# Altium PCB MainPCB.PcbDoc
Units mil, origin at the board's own origin, x right, y up, seen from the top; angles counter-clockwise.
Board outline 2055 x 2105 mil, 2 copper layers (Top Layer, Bottom Layer); 18 components, 10 nets, 70 pads, 3 vias.
Unrouted connection lines stored in the file: 1.
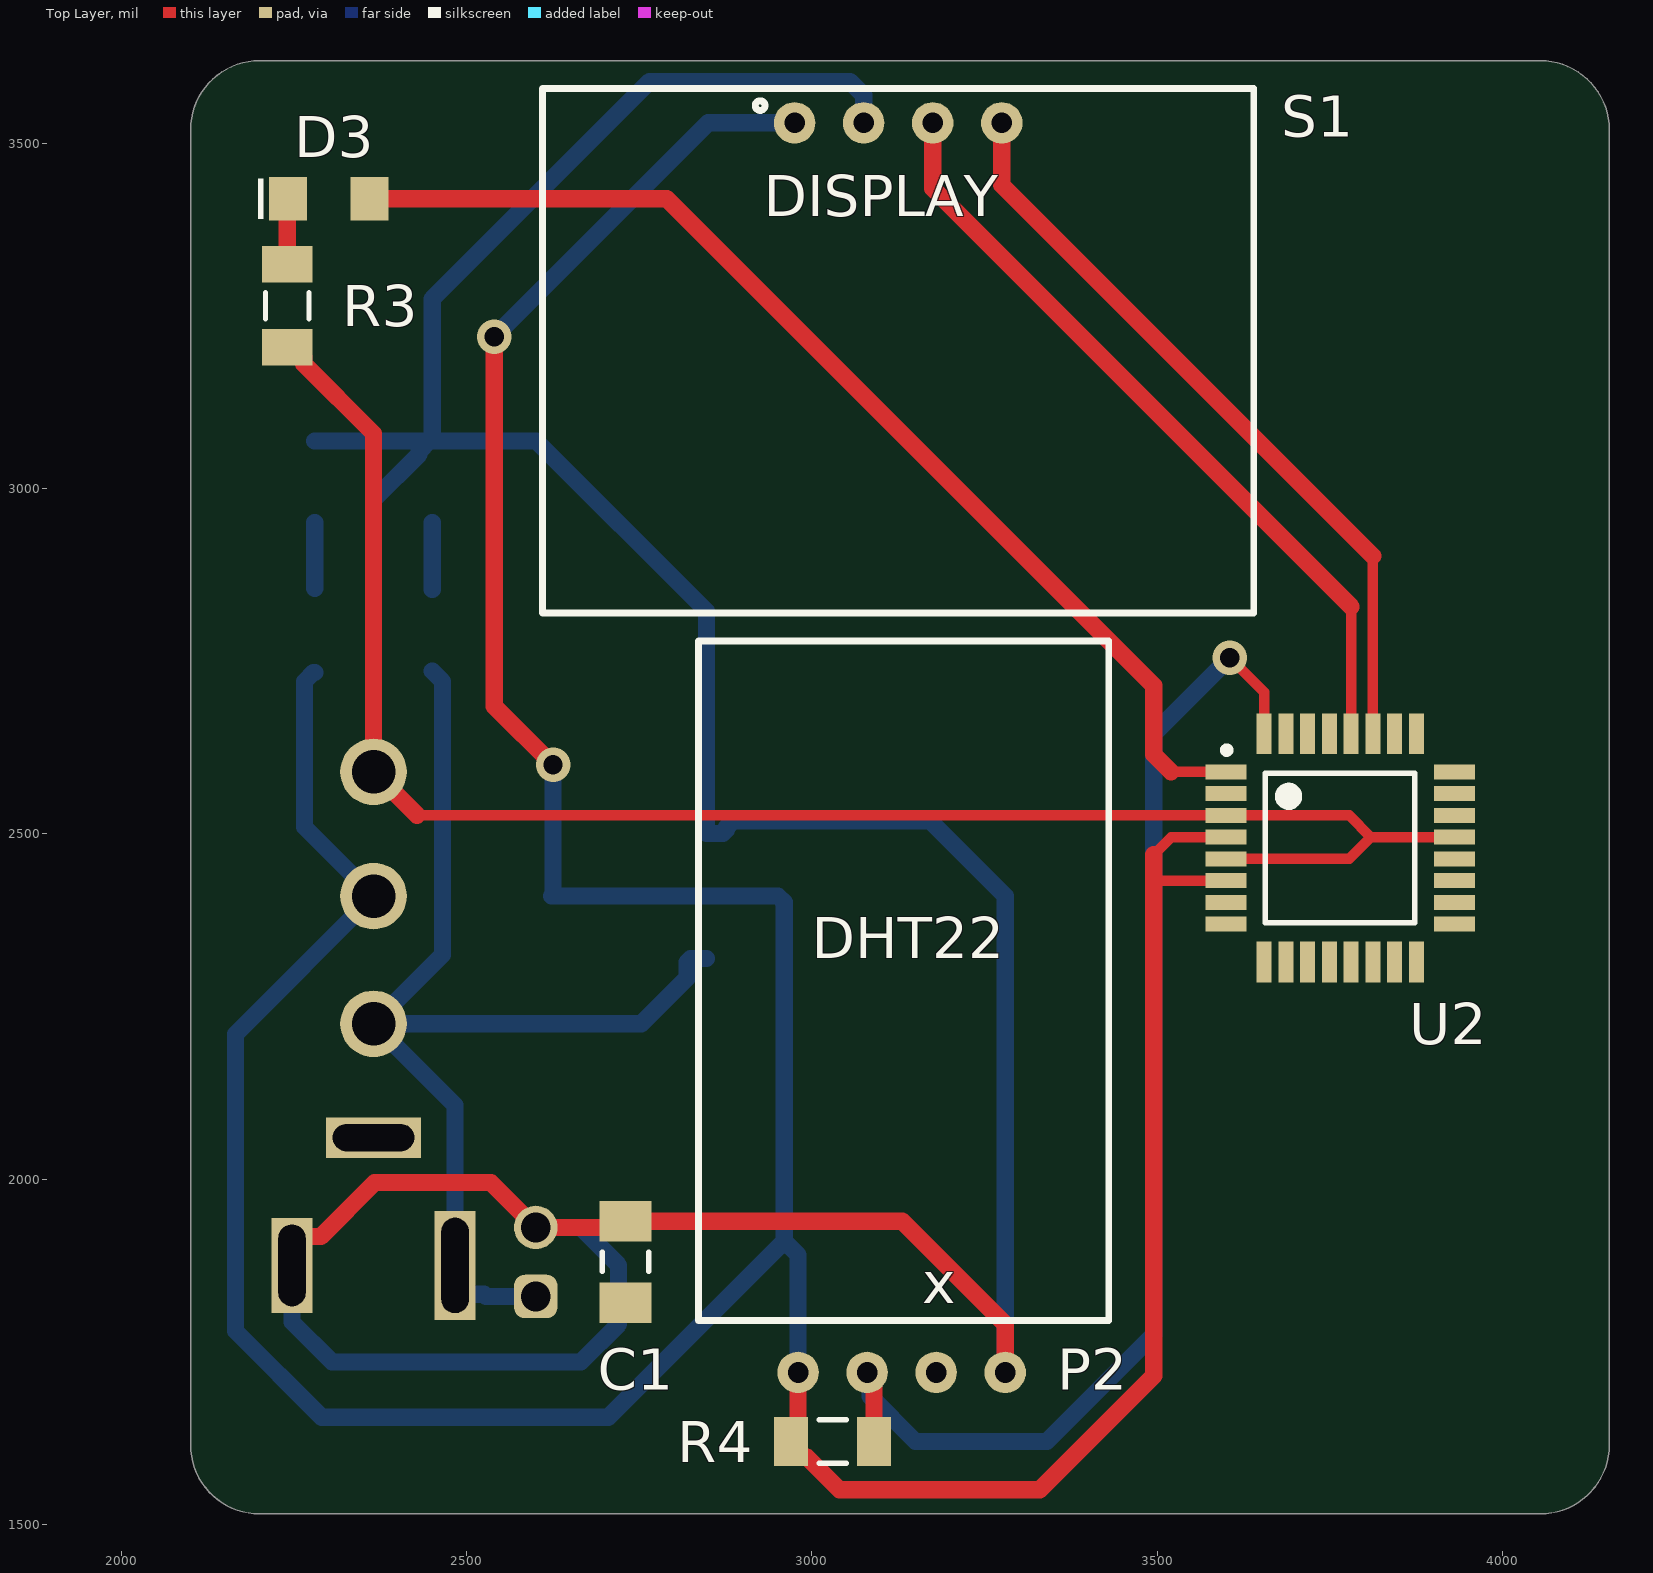
[diagram p0: Top Layer view]
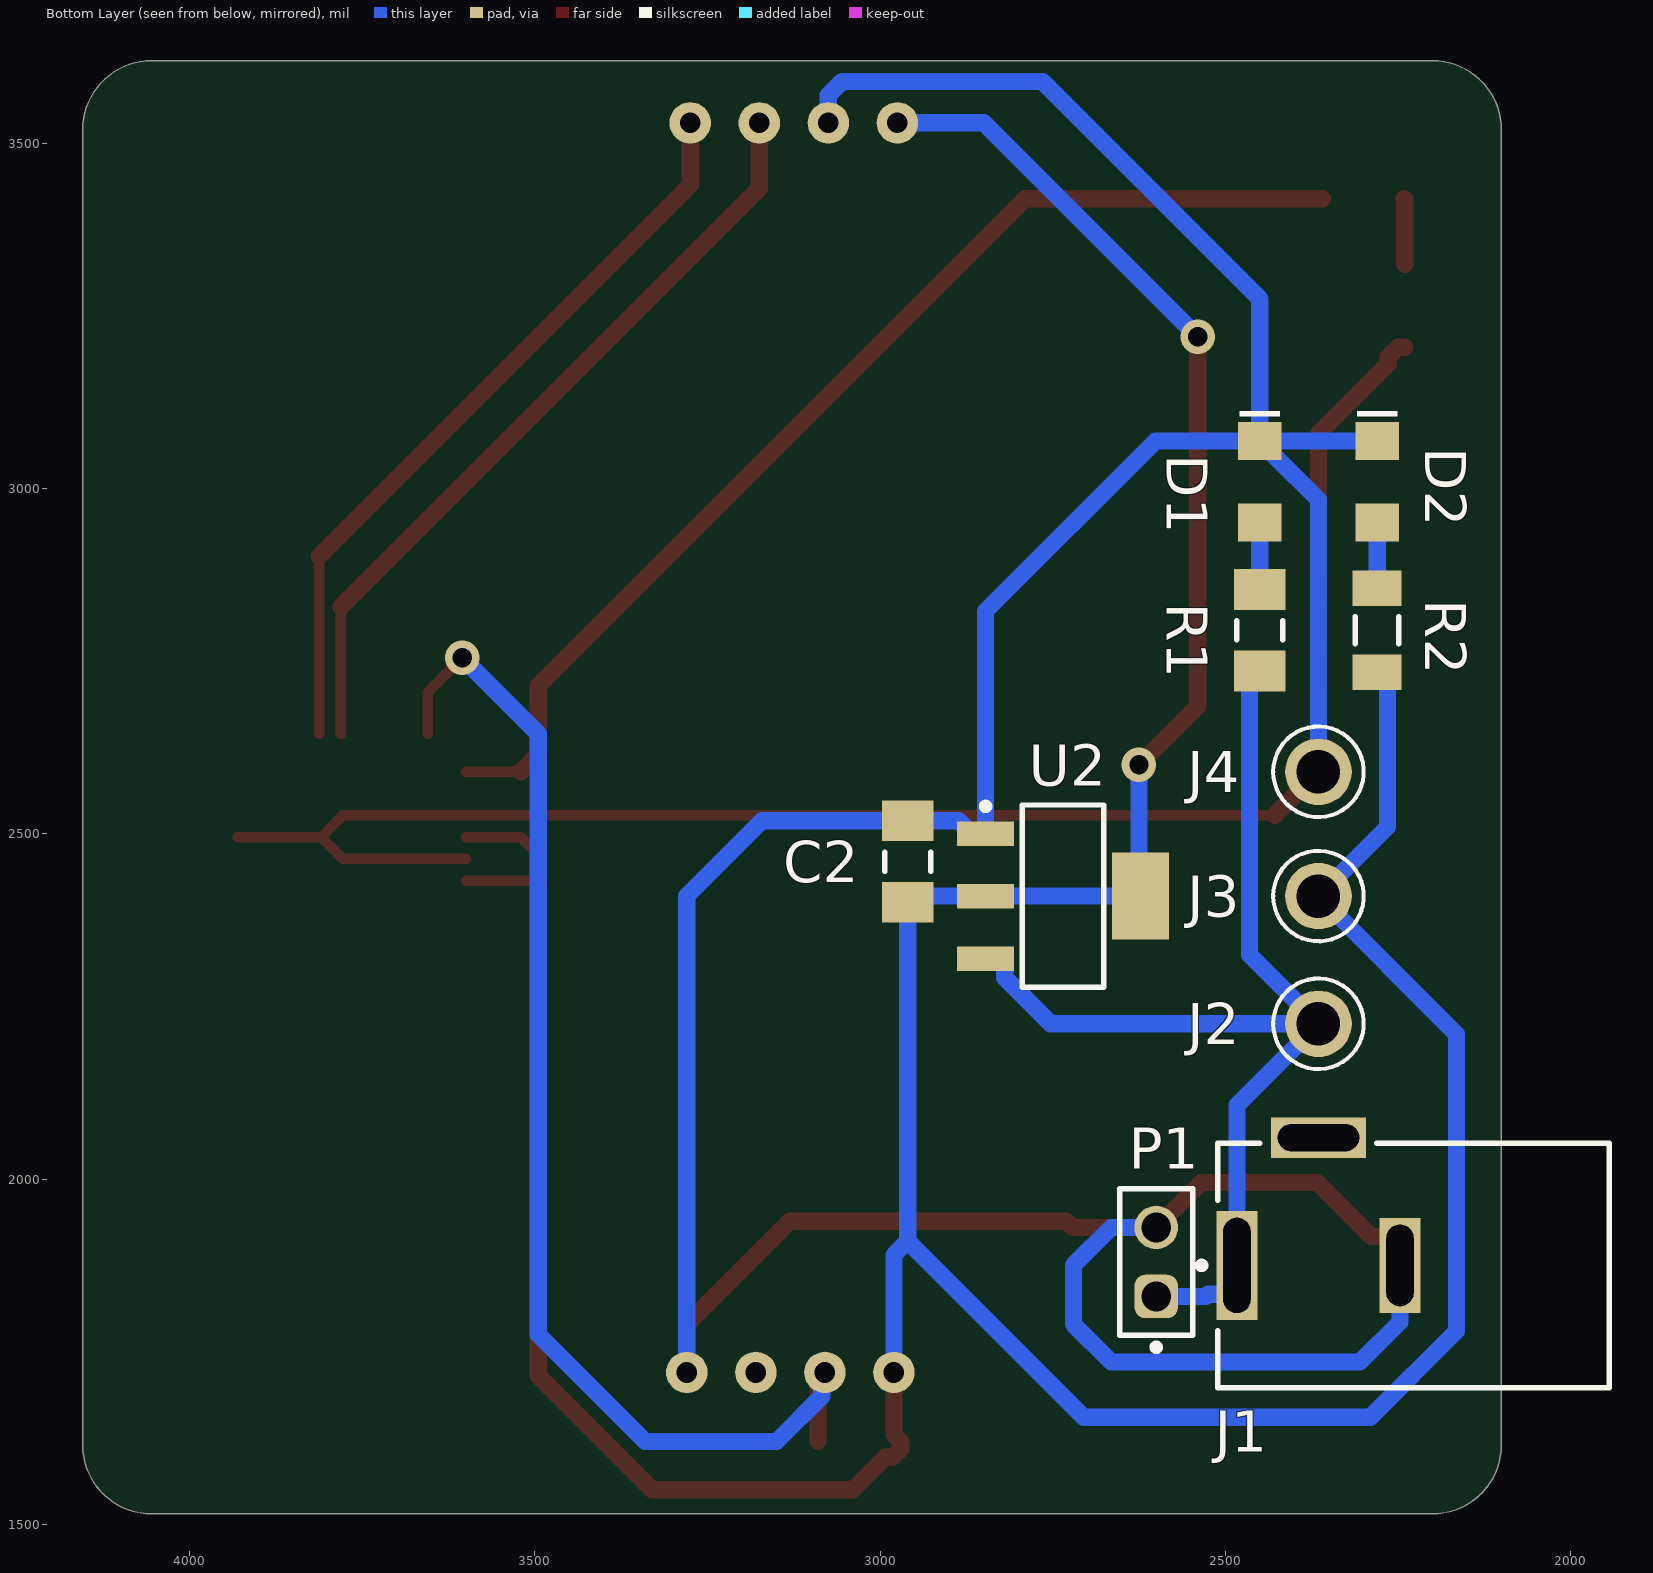
[diagram p1: Bottom Layer view, seen from below]
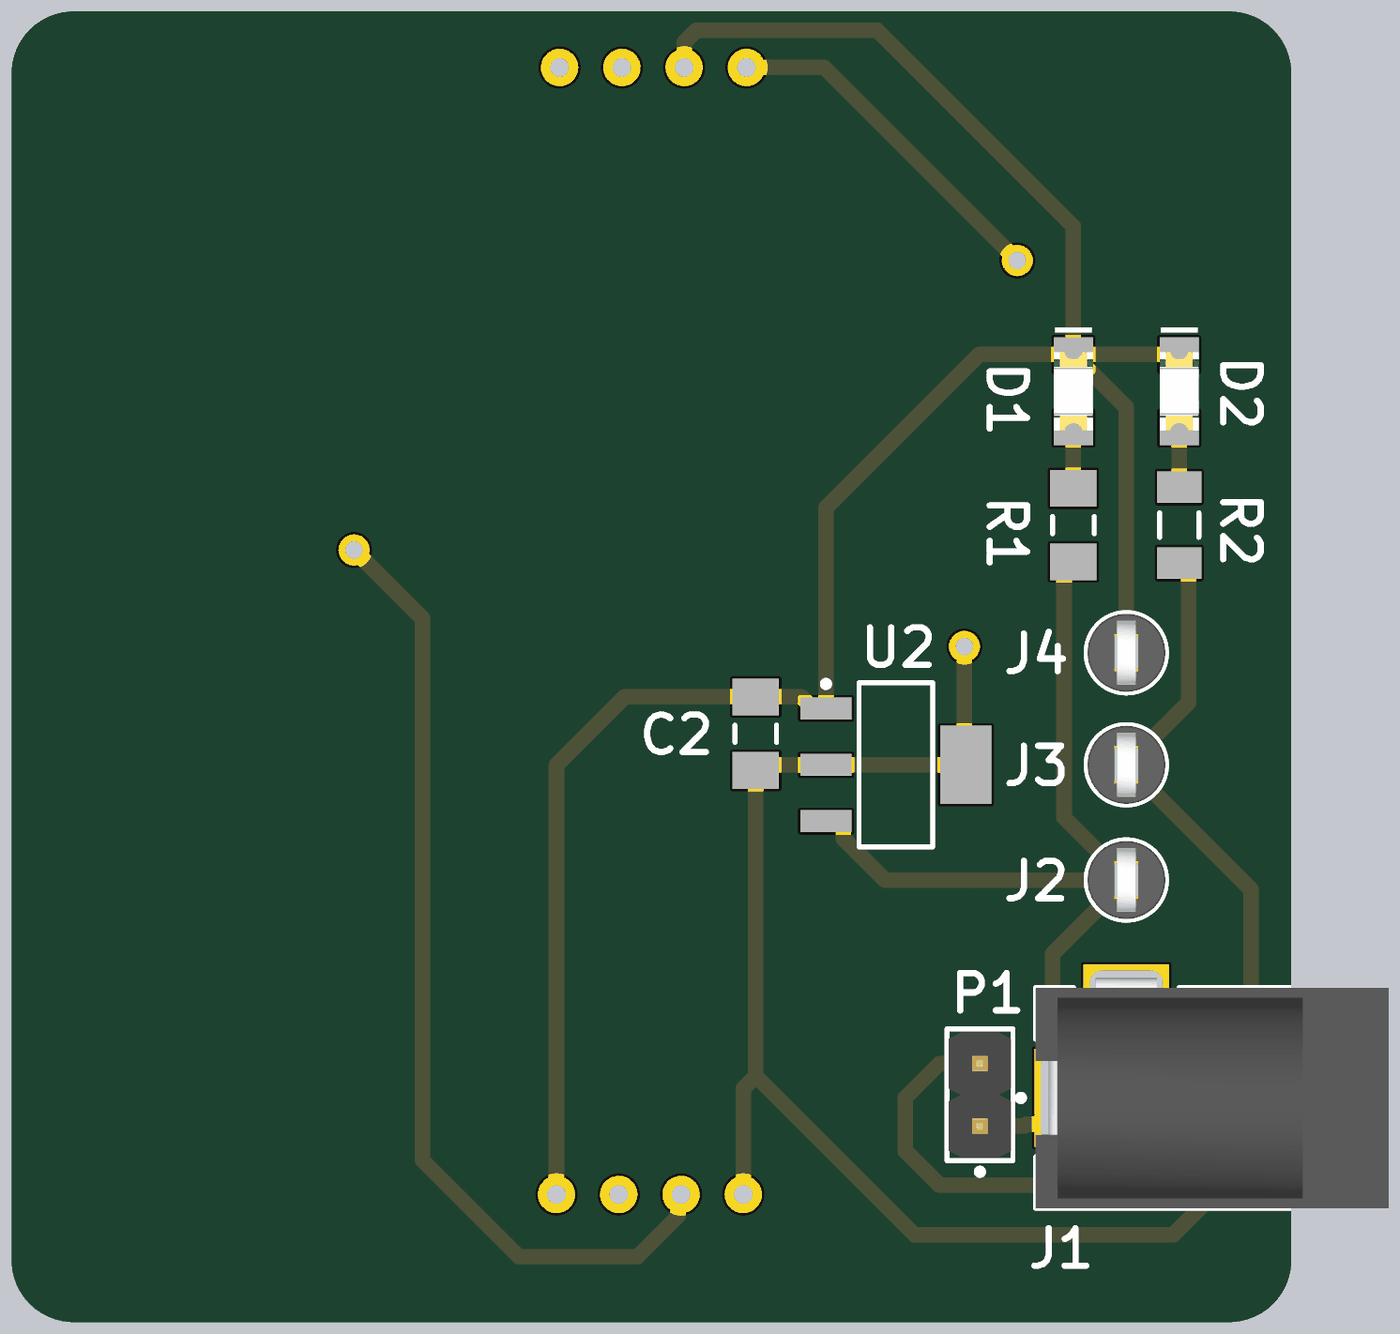
[diagram p2: 3D render of the assembled board from below, using the file's embedded part models]

## Layer stack, top to bottom
Top Solder: solder mask 0.4, Solder Resist, Dk 3.5
Top Layer: signal copper 1.4
Dielectric 1: dielectric 12.6, FR-4, Dk 4.8
Bottom Layer: signal copper 1.4
Bottom Solder: solder mask 0.4, Solder Resist, Dk 3.5

## Board outline
2100,1615 2100,3520 cw(c2200,3520) 2200,3620 4055,3620 cw(c4055,3520) 4155,3520 4155,1615 cw(c4055,1615) 4055,1515 2200,1515 cw(c2200,1615)

## Design rules (kind name [scope] priority, off if disabled: settings)
Clearance [All] p1: gap=10 ignorepadtopadclearanceinfootprint=TRUE
PolygonConnect [All] p1: connectstyle=Relief reliefconductorwidth=10 reliefentries=4 polygonreliefangle="90 Angle" airgapwidth=10
RoutingVias [All] p1: holewidth=28 width=50 viastyle="Through Hole" minholewidth=28 minwidth=50 maxholewidth=28 maxwidth=50
SolderMaskExpansion [All] p1: expansion=4 istentingtop=FALSE
SupplyNets "Schematic Supply Nets_3" [InNet('GND')] p1: voltage=0.000
SupplyNets "Schematic Supply Nets_1" [InNet('9V0')] p2: voltage=0.000
SupplyNets "Schematic Supply Nets" [InNet('5V0')] p3: voltage=0.000
Width [All] p1: maxlimit=25 minlimit=25 preferedwidth=25 minimp=50.000000 maximp=50.000000 favimp=50.000000
30 further rules are at their usual default settings.

## Classes and differential pairs
component class Main: C1 C2 D1 D2 D3 J1 J2 J3 J4 P1 P2 R1 R2 R3 R4 S1 U2

## Components (designator, comment, footprint, x,y, rotation, side; value= is the part's Value field where it differs from the comment)
C1 "1uF" CAPC3216X180X50ML20T25 2730,1880 r270 top
C2 "1uF" CAPC3216X180X50ML20T25 2960,2460 r270 bottom
D1 "150120SS75000" WL-SMCW_1206_150120xx75000 2450,3010 r270 bottom
D2 "150120SS75000" WL-SMCW_1206_150120xx75000 2280,3010 r270 bottom
D3 "150120BS75000" WL-SMCW_1206_150120xx75000 2300,3420 r0 top
J1 "Power Jack" CUI-PJ-002A_V 2365,1874.96 r180 bottom
J2 "5006" FP-5006-MFG 2365,2225 r90 bottom
J3 "5006" FP-5006-MFG 2365,2410 r90 bottom
J4 "5006" FP-5006-MFG 2365,2590 r90 bottom
P1 "61300211121" 61300211121 2600,1880 r90 bottom
P2 "DHT22" DHT22 3130,1720 r0 top locked
R1 "910Ω" RESC3216X70X50ML20T25 2450,2795 r90 bottom
R2 "510Ω" RESC3216X60X45ML10T20 2280,2795 r90 bottom
R3 "330Ω" FP-CRCW1206-e3-IPC_A 2240,3265 r270 top
R4 "10kΩ" RESC3116X65X40ML10T20 3030,1620 r0 top
S1 "OLED" display 3125,3530 r0 top
U2 "9V->5V" SOT-223_L 2735,2410 r180 bottom
U2 "ATMEGA328P-AUR" FP-32A-MFG 3765.24,2479.65 r0 top

## Footprints (in the part's own frame and the unit in brackets; to place one, negate y for a bottom-side part, rotate by r counter-clockwise, add the part's x,y. Pads: shape width x height; smd on the part's side, far side on the other; paste and mask are expansions set on the pad)
61300211121 [mm] "Pin Header, pitch 2.54 mm, THT, Vertical, single row, 2p"
  rrect50% 1.6x1.6 hole 1.1: 1(-1.27,0)
  round 1.6 hole 1.1: 2(1.27,0)
  silkscreen extent -3.26,-1.35 2.69,1.35, body extent -2.54,-1.27 2.54,1.27, height 8.57
CAPC3216X180X50ML20T25 [mm] "Chip Capacitor, 2-Leads, Body 3.40x1.80mm, IPC Low Density"
  rect 1.5x1.9 smd: 1(-1.5,0) 2(1.5,0)
  silkscreen extent -0.35,-0.85 0.35,0.85, body extent -1.7,-0.9 1.7,0.9, height 1.8
CUI-PJ-002A_V [mm] "THD, 3-Leads, Body 14.4x9mm, Height 11mm"
  rect 1.5x4 hole 1 slot 3.5 at 90 deg: 1(-3,0)
  rect 1.5x3.5 hole 1 slot 3 at 90 deg: 2(3,0)
  rect 3.5x1.5 hole 1 slot 3 at 0 deg: 3(0,4.7)
  silkscreen extent -4.43,-4.5 10.7,4.5, body extent -3.7,-4.5 10.7,4.9, height 11
DHT22 [mil]
  round 60 hole 30: 1(-150,0) 2(-50,0) 3(50,0) 4(150,0)
  silkscreen extent -294,75 300,1059
display [mil]
  round 60 hole 30: 1(-150,0) 2(-50,0) 3(50,0) 4(150,0)
  silkscreen extent -515,-710 515,50
FP-32A-MFG [mm]
  rect 1.5x0.55 smd paste+0 mask+0: 1(-4.2,2.8) 2(-4.2,2) 3(-4.2,1.2) 4(-4.2,0.4) 5(-4.2,-0.4) 6(-4.2,-1.2) 7(-4.2,-2) 8(-4.2,-2.8) 17(4.2,-2.8) 18(4.2,-2) 19(4.2,-1.2) 20(4.2,-0.4) 21(4.2,0.4) 22(4.2,1.2) 23(4.2,2) 24(4.2,2.8)
  rect 0.55x1.5 smd paste+0 mask+0: 9(-2.8,-4.2) 10(-2,-4.2) 11(-1.2,-4.2) 12(-0.4,-4.2) 13(0.4,-4.2) 14(1.2,-4.2) 15(2,-4.2) 16(2.8,-4.2) 25(2.8,4.2) 26(2,4.2) 27(1.2,4.2) 28(0.4,4.2) 29(-0.4,4.2) 30(-1.2,4.2) 31(-2,4.2) 32(-2.8,4.2)
  silkscreen extent -4.3,-2.75 2.75,3.72, body extent -5.05,-5.05 5.05,5.05, height 0.25
FP-5006-MFG [mm]
  round 2.45 hole 1.6 paste-2539.97 mask+0: 1(0,0)
  silkscreen extent -1.66,-1.66 1.66,1.67, body extent -1.58,-1.59 1.58,1.59, height 5.74
FP-CRCW1206-e3-IPC_A [mil]
  rect 53.39x73.16 smd paste+0 mask+0: 1(-60.08,0) 2(60.08,0)
  silkscreen extent -19,-31 19,31, body extent -106,-56 106,56, height 10
RESC3116X65X40ML10T20 [mm] "Chip Resistor, 2-Leads, Body 3.10x1.60mm, IPC Low Density"
  rect 1.25x1.8 smd: 1(-1.525,0) 2(1.525,0)
  silkscreen extent -0.5,-0.8 0.5,0.8, body extent -1.6,-0.85 1.6,0.85, height 0.65
RESC3216X60X45ML10T20 [mm] "Chip Resistor, 2-Leads, Body 3.20x1.60mm, IPC Low Density"
  rect 1.3x1.8 smd: 1(-1.55,0) 2(1.55,0)
  silkscreen extent -0.5,-0.8 0.5,0.8, body extent -1.65,-0.85 1.65,0.85, height 0.6
RESC3216X70X50ML20T25 [mm] "Chip Resistor, 2-Leads, Body 3.20x1.60mm, IPC Low Density"
  rect 1.5x1.9 smd: 1(-1.5,0) 2(1.5,0)
  silkscreen extent -0.35,-0.85 0.35,0.85, body extent -1.7,-0.9 1.7,0.9, height 0.7
SOT-223_L [mm] "SOT223, 4-Leads, Body 6.5x3.5mm, Pitch 2.3mm, Lead Span 7mm, IPC High Density"
  rect 2.1x0.9 smd: 1(-2.85,2.3) 2(-2.85,0) 3(-2.85,-2.3)
  rect 2.1x3.2 smd: 4(2.85,0)
  silkscreen extent -2.98,-3.35 1.5,3.42, body extent -1.85,-3.35 1.85,3.35, height 1.8
WL-SMCW_1206_150120xx75000 [mm] "SMD Mono-color Chip LED, body 3.2x1.6mm"
  rect 1.4x1.6 smd: 1(-1.5,0) 2(1.5,0)
  silkscreen extent -2.6,-0.75 -2.4,0.75, body extent -1.6,-0.8 1.6,0.8, height 0.68

## Part data
C1 C2: library part CMP-2000-04991-1, "Chip Capacitor, 1 uF, +/- 10%, 25 V, -55 to 125 degC, 1206 (3216 Metric), RoHS, Tape and Reel", Capacitance - nF=1000nF, Case Code - in=1206, Case Code - mm=3216, Case Height=1.6mm, Case Length=3.2mm, Dielectric=X7R, Manufacturer=Kemet, Maximum Operating Temperature=+125C, Minimum Operating Temperature=-55C, Operating Temperature Range=-55Cto+125C, Package / Case=1206(3216metric), Package Description="2-Pin Surface Mount Device, Body 3.2 x 1.6 mm", Temperature Coefficient / Code=+/-15%, Tolerance=10%, Voltage Rating=25V, Brand=Kemet, Capacitance=1uF, Case Width=1.6mm, Class=Class1, Datasheet URL=https://ciiva.com/datasheet-click-18194173?src=ciiva&sig=6daff8c4, Datasheet Version=Jul-14, Dimensions=1.6mmWx3.2mmLx1.6mmH, Factory Pack Quantity=2000, Manufacturer URL=http://www.kemet.com/, Package Reference=1206, Packaging=Reel, Product=GeneralTypeMLCCs, Product Category=MultilayerCeramicCapacitorsMLCC-SMD/SMT, RoHS=Details, Series=C1206C, Termination Style=SMD/SMT, Type=SMDMLCCX7R6.3-250VDCCommericalGrade, Voltage Rating DC=25V
D1 D2: library part CMP-1426-00017-3, "Led, Red, 630 Nm, 1.9 V, 30 Ma, 60 Mcd Rohs Compliant: Yes", Case Code (Imperial)=1206, Case Code (Metric)=3216, Color=Red, Forward Current=100mA, Forward Voltage=1.9V, Max Operating Temperature=85°C, Max Reverse Voltage (DC)=5V, Min Operating Temperature=-40°C, Test Current=20mA, Case/Package=1206, Dominant Wavelength=630nm, Height=680µm, Length=3.2mm, Lens Style="Clear, Rectangular", Luminous Intensity=60mcd, Mount="Surface Mount", Packaging="Tape and Reel", Peak Wavelength=645nm, REACH SVHC=Unknown, RoHS=Compliant, Viewing Angle=140°, Wavelength=630nm, Width=1.6mm
D3: library part CMP-1426-00015-3, "WL-SMCW SMT Mono-Color Chip LED Waterclear", Case Code (Imperial)=1206, Case Code (Metric)=3216, Color=Blue, Forward Current=100mA, Forward Voltage=3.2V, Manufacturer Package Identifier=LED_1206, Max Operating Temperature=85°C, Max Reverse Voltage (DC)=5V, Min Operating Temperature=-40°C, Test Current=20mA, Case/Package=1206, Dominant Wavelength=470nm, Height=680µm, Length=3.2mm, Lens Style="Clear, Rectangular", Luminous Intensity=145mcd, Mount="Surface Mount", Packaging="Tape and Reel", Peak Wavelength=465nm, REACH SVHC=Unknown, RoHS=Compliant, Viewing Angle=140°, Wavelength=470nm, Width=1.6mm
J1: library part CMP-2000-06895-2, "Through Hole Right Angle DC Power Jack, 2.5 A, 2 mm Center Pin, 3 Position, -25 to 85 degC, RoHS, Bulk", Current Rating=2.5A, Flammability Rating=UL94V-0, Insulation Resistance=50MOhms, Manufacturer=CUIInc., Operating Temperature Range=-25Cto+85C, Package Description="3-Pin Through Hole Device, Body 14.4 x 9 mm, Height 11 mm", Package Reference=PJ-002A, Voltage Rating=24V, Brand=CUI, Connector Type=DCPowerJack, Contact Gender=Male, Contact Material=Copper, Contact Plating=Nickel, Datasheet URL=http://www.cui.com/product/resource/pj-002a.pdf, Datasheet Version="Rev. 1.03, 04/2016", Factory Pack Quantity=500, Housing Material=PolybutyleneTerephthalate(PBT), Inside Contact Diameter=2mm, Manufacturer URL=http://www.cui.com/, Mounting Angle=Right, Mounting Style=ThroughHole, Mounting Technology=ThroughHole, Outside Contact Diameter=6.5mm, Product=Jacks, Product Category=DCPowerConnectors, RoHS=True, Termination Style=ThroughHole
J2 J3 J4: library part CMP-19636-000022-1, "PC TEST POINT COMPACT BLACK", Color=Black, Flammability Rating="UL94 V-0", Package Quantity=100, Body Material=Bronze, Contact Material=Bronze, Contact Plating=Tin, Height=0.35inch, Hole Diameter=1.6mm, Housing Color=Black, Inside Diameter=1.78mm, Insulation Material=Nylon, Lead Free="Lead Free", Length=8.89mm, Material=Nylon, Mount=PCB, Number of Ports=1, Orientation=Straight, Outside Diameter=3.18mm, Packaging=Bulk, Plating=Silver, REACH SVHC="No SVHC", RoHS Compliant=Yes, Series=THM
P1: library part CMP-1712-00002-6, Color=Black, Contact Resistance=20mΩ, Current Rating=3A, Max Operating Temperature=125°C, Min Operating Temperature=-40°C, Operating Supply Voltage=250V, Connector Type="Male Pin", Contact Gender=Male, Contact Material=Copper, Contact Mating Length=5.9944mm, Contact Plating=Gold, Gender=Male, Height=8.94mm, Housing Material=PBT, Lead Free="Lead Free", Lead Pitch=2.54mm, Mount="Through Hole", NexarPartId=20081794, Number of Contacts=2, Number of Pins=2, Number of Positions=2, Number of Rows=1, Orientation=Vertical, Packaging=Bulk, Pitch=2.54mm, REACH SVHC="No SVHC", RoHS=Compliant, Termination="Through Hole", Voltage Rating=250V
P2: "4.2 mm Pitch Mini-Fit Jr.Power Connector, Vertical, Through Hole, 6 Circuits, -40 to 105 degC, RoHS, Bag", PartNumber=39-28-1063, Temperature Max="105 degC", Temperature Min="-40 degC", ComponentLink1Description="Manufacturer URL", ComponentLink1URL=http://www.molex.com/, ComponentLink2Description=Datasheet, ComponentLink2URL=http://www.molex.com/webdocs/datasheets/pdf/en-us/0039281063_PCB_HEADERS.pdf, ComponentLink3Description="Package Specification", ComponentLink3URL=http://www.molex.com/pdm_docs/sd/039281063_sd.pdf, Mounting Technology="Through Hole", No. of Positions=6, No. of Rows=2, Orientation=Vertical, PackageDescription="6-Pin PCB Header, Vertical, Pitch 4.2 mm, Through Hole", PackageVersion="Rev. F, 06/2009", Packing=Bag, Pitch="4.2 mm", RoHS=TRUE
R1: library part CMP-2003-00012-1, Manufacturer=Panasonic, Part Number=ERA8AEB911V
R2: library part CMP-2003-02257-1, Manufacturer="Vishay Dale", Part Number=CRCW1206510RFKEA
R3: library part CMP-2003-02098-2, "RES Thick Film, 330Ω, 1%, 0.25W, 100ppm/°C, 1206", Case Code (Imperial)=1206, Case Code (Metric)=3216, Max Operating Temperature=155°C, Max Power Dissipation=250mW, Min Operating Temperature=-55°C, Package Quantity=10, Resistance=330R, Temperature Coefficient=100ppm/°C, Tolerance=1%, Voltage Rating=200V, Case/Package=1206, Composition="Thick Film", Contact Plating=Tin, Depth=1.6mm, Features="Automotive AEC-Q200", Height=0.55mm, Lead Free="Lead Free", Length=3.2mm, Military Standard=Not, Mount="Surface Mount", Number of Terminations=2, Packaging="Tape and Reel", Power Rating=250mW, Radiation Hardening=No, Termination=SMD/SMT, Voltage Rating (DC)=200V, Weight=0.000353oz, Width=1.6mm
R4: library part CMP-1014-00623-2, "Chip Resistor, 10 KOhm, +/- 1%, 0.25 W, -55 to 155 degC, 1206 (3216 Metric), RoHS, Tape and Reel", Case Code (Imperial)=1206, Case Code (Metric)=3216, Manufacturer=Yageo, Max Operating Temperature=155degC, Min Operating Temperature=-55degC, Package Description="2-Pin Surface Mount Device, Body 3.1 x 1.6 mm", Package Quantity=5000, Package Reference=1206.0, Power Rating=250mW, Resistance=10KOhm, Temperature Coefficient=100ppm/degreesC, Tolerance=1%, Voltage Rating=200V, Case/Package=1206, Composition=ThickFilm, Datasheet URL=http://www.yageo.com/NewPortal/yageodocoutput?fileName=/pdf/R-Chip/PYu-RC_Group_51_RoHS_L_5.pdf, Datasheet Version="Rev. 5, 10/2016", Depth=1.6mm, Height=0.55mm, Lead Free=LeadFree, Length=3.1mm, Manufacturer URL=http://www.yageo.com/, Military Standard=Not, Packaging=TapeandReel, REACH SVHC=Unknown, RoHSCompliant=true, Termination=SMD/SMT, Width=1.6mm
S1: library part Screen, "Small OLED display", PartNumber=39-28-1063, Temperature Max="105 degC", Temperature Min="-40 degC", ComponentLink1Description="Manufacturer URL", ComponentLink1URL=http://www.molex.com/, ComponentLink2Description=Datasheet, ComponentLink2URL=http://www.molex.com/webdocs/datasheets/pdf/en-us/0039281063_PCB_HEADERS.pdf, ComponentLink3Description="Package Specification", ComponentLink3URL=http://www.molex.com/pdm_docs/sd/039281063_sd.pdf, Mounting Technology="Through Hole", No. of Positions=6, No. of Rows=2, Orientation=Vertical, PackageDescription="6-Pin PCB Header, Vertical, Pitch 4.2 mm, Through Hole", PackageVersion="Rev. F, 06/2009", Packing=Bag, Pitch="4.2 mm", RoHS=TRUE
U2: library part CMP-0244-00312-1, "Fixed Low Drop Positive Voltage Regulator, 5V, 4-Pin SOT-223, Tape and Reel", ComponentLink1Description="Manufacturer URL", ComponentLink1URL=http://www.st.com, ComponentLink2Description=Datasheet, ComponentLink2URL=http://www.st.com/internet/com/TECHNICAL_RESOURCES/TECHNICAL_LITERATURE/DATASHEET/CD00000544.pdf, DatasheetVersion=1/11/2011, PackageDescription="4-Pin SOT-223 Package, 6.5 x 3.5 mm Body, 2.3 mm Pitch, 7 mm Lead Span", PackageReference=SOT-223, PackageVersion=2010
U2: library part CMP-06276-000046-1, "IC MCU 8BIT 32KB FLASH 32TQFP", Case/Package=TQFP, Frequency=40MHz, Max Operating Temperature=85°C, Min Operating Temperature=-40°C, Core Architecture=PIC, Interface=I2C, Memory Size=32KB, Memory Type=FLASH, Number of I/Os=32, Oscillator Type=Internal, Packaging="Cut Tape", Peripherals="Brown-out Detect/Reset"

## Via types
v1: diameter 50, hole 28, Top Layer to Bottom Layer, 3 vias

## Nets (pads, with @x,y where several pads share a name; then routed paths per layer and width w, separated by ;. In a path a pad name is that pad's centre, name@x,y a point inside that pad or via, vN(x,y) a via of type N, cw(c..) or ccw(c..) an arc to the next point about the centre after c; other vN are vias at no path point)
5V0: C2.2 J3.1 P2.1 R2.1 R4.1 S1.1 U2.2@2847.2,2410 U2.4 U2.6 | length 6186.8
  Top Layer w15: 3495,2470 3520.39,2495.39 U2.4@3599.88,2495.39 ; 3497.4,2432.4 U2.6
  Top Layer w25: v1(2540,3220) 2540,2685 v1(2625,2600) ; P2.1 2980,1630.04 R4.1 2969.96,1609.17 2982.07,1597.07 2992.89,1597.07 3039.96,1550 3330,1550 3495,1715 3495,2430 ; 3495,2470 3495,2430 ; 3497.4,2432.4 3495,2430
  Bottom Layer w25: R2.1 2278.09,2733.98 2265,2720.89 2265,2510 J3.1 2165,2210 2165,1780 2290,1655 2705,1655 2960,1910 ; v1(2540,3220) 2850,3530 S1.1 ; v1(2625,2600) 2625,2412.2 2622.8,2410 2847.2,2410 2950.94,2410 C2.2 2960,1910 ; P2.1 2980,1890 2960,1910
9V0: C1.2 J1.1 J2.1 P1.1 R1.1 U2.3@2847.2,2319.45 | length 1642.2
  Bottom Layer w25: R1.1 2465,2720.94 2465,2325 J2.1 ; P1.1 2528.07,1830 2524.89,1833.18 2500.14,1833.18 2483.11,1850.21 J1.1 2483.11,2106.89 J2.1 ; U2.3@2847.2,2319.45 2824.48,2319.45 2819.27,2314.23 2819.27,2291.51 2752.76,2225 J2.1
"DHT22 Data": P2.2 R4.2 U2.32 | length 1798.6
  Top Layer w15: v1(3605,2755) 3655,2705 U2.32
  Top Layer w25: P2.2 3080,1710.53 3090.04,1700.49 R4.2
  Bottom Layer w25: P2.2 3084.62,1715.38 3084.62,1685.38 3150,1620 3340,1620 3495,1775 3495,2645 v1(3605,2755)
GND: C1.1 C2.1 D1.1 D2.1 J1.2 J4.1 P1.2 P2.4 R3.2 S1.2 U2.1@2847.2,2500.55 U2.3@3599.88,2526.89 U2.5 U2.21 | length 8280.6
  Top Layer w15: 2428.11,2526.89 3599.88,2526.89 3778.11,2526.89 3809.61,2495.39 ; U2.5 3778.11,2463.9 3809.61,2495.39 ; U2.21 3809.61,2495.39
  Top Layer w25: R3.2 2249.89,3204.92 2264.08,3190.72 2264.08,3180.84 2365,3079.92 J4.1 2428.11,2526.89 ; J1.2 2246.89,1899.71 2263.92,1916.74 2288.67,1916.74 2366.93,1995 2535,1995 P1.2 2720.94,1930 C1.1 3130.94,1939.06 3280,1790 P2.4
  Bottom Layer w25: J1.2 2246.89,1793.11 2305,1735 2665,1735 2720,1790 2720,1875 2665,1930 P1.2 ; D2.1 D1.1@2446.06,3069.06 ; J4.1 2365,2984.06 2431,3050.06 2431,3054 D1.1@2446.06,3069.06 ; S1.2 3075,3570 3055,3590 2765,3590 2450,3275 D1.1 ; P2.4 3280,2410 3170.94,2519.06 C2.1 2886.29,2519.06 2876.04,2508.8 2876.04,2505.77 2870.83,2500.55 2847.2,2500.55 2847.2,2822.8 2600.94,3069.06 D1.1 ; D1.1@2446.06,3069.06 D1.1
"Indicator LED": D3.2 U2.1@3599.88,2589.88 | length 1643.2
  Top Layer w15: 3520.12,2589.88 U2.1@3599.88,2589.88
  Top Layer w25: D3.2 2789.86,3420 3495,2714.86 3495,2615 3520.12,2589.88
NetD1_2: D1.2 R1.2 | length 96.9
  Bottom Layer w25: R1.2 D1.2
NetD2_2: D2.2 R2.2 | length 94.9
  Bottom Layer w25: R2.2 D2.2
NetD3_1: D3.1 R3.1 | length 95.3
  Top Layer w25: R3.1 2240,3419.06 D3.1
SCL: S1.3 U2.28 | length 1136
  Top Layer w15: U2.28 3780.98,2829.02
  Top Layer w25: S1.3 3175,3435 3780.98,2829.02
SDA: S1.4 U2.27 | length 1107.6
  Top Layer w15: U2.27 3812.48,2902.52
  Top Layer w25: S1.4 3275,3440 3812.48,2902.52
pads on no net: J1.3 P2.3 U2.2@3599.88,2558.39 U2.7 U2.8 U2.9 U2.10 U2.11 U2.12 U2.13 U2.14 U2.15 U2.16 U2.17 U2.18 U2.19 U2.20 U2.22 U2.23 U2.24 U2.25 U2.26 U2.29 U2.30 U2.31

## Silkscreen, mask and mechanical layers (free items; w line width, h text height)
Mechanical 1:
  the board outline again, w10

## Text inside footprints (layer, text, board x,y; h text height)
P2: Top Overlay "x" at 3160,1820 h60
S1: Top Overlay "DISPLAY" at 2930.06,3395 h60